# EAGLE board Buffered Mult PANEL (EAGLE 7.7.0)
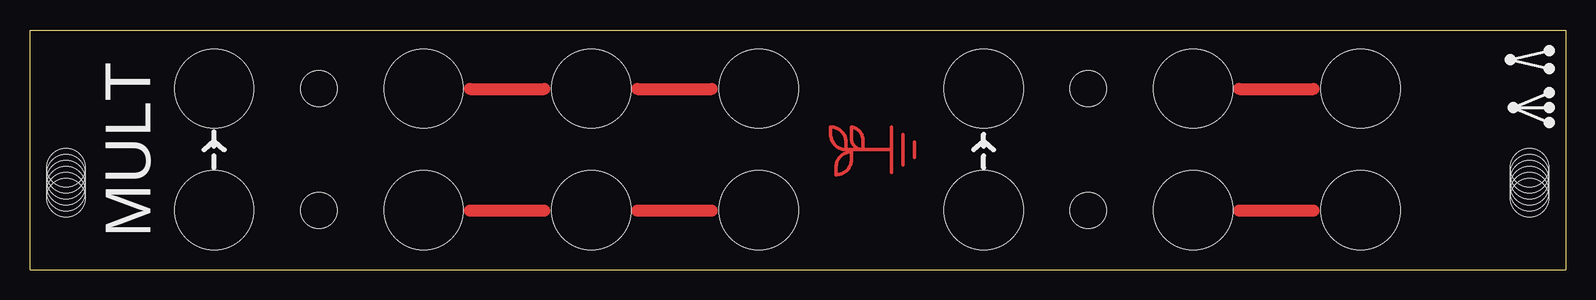
[diagram p0: board, top side]
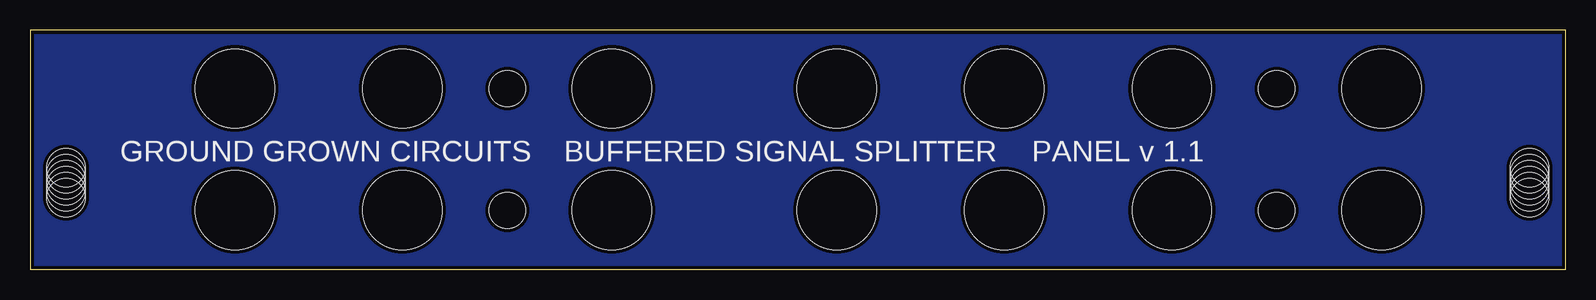
[diagram p1: board, bottom side, seen from below]

Size 128 x 20 mm. Coordinates in mm from the lower left corner, seen from the top.
Outline: 0,0 0,20 128,20 128,0 0,0
Copper layers (1*16): Top 0.035mm / dielectric 1.5mm / Bottom 0.035mm
Design rules "SparkFun": minimum track width 8mil, minimum drill 20mil, track to track 8mil, track to pad 8mil, pad to pad 8mil, via to via 8mil, smd to smd 8mil, copper to edge 8mil, drill to drill 8mil, minimum pad ring 12mil, minimum via ring 10mil, stop-mask expansion 4mil, vias tented up to drill 20mil, thermal gap 10mil
Holes 6.6 mm at 15.35,15.11 15.35,4.95 32.81,15.11 32.81,4.95 46.78,4.95 46.78,15.11 60.75,4.95 60.75,15.11 79.48,15.11 79.48,4.95 96.95,15.11 96.95,4.95 110.92,15.11 110.92,4.95
Holes 3 mm at 24.08,4.95 24.08,15.11 88.22,4.95 88.22,15.11
Holes 3.2 mm at 3,7.5 3,8 3,8.5 3,7 3,6.5 3,6 125,7.5 125,8 125,8.5 125,7 125,6.5 125,6

## Placement (x,y rotation side)
E$1  [LOGO_SMALL_COPPER]  71.75,10 90 top

## Library data of the parts
E$1 = GroundGrownCircuits

## Tracks (layer width: path | path; a pad name or v marks a point on that pad's centre or on a via)
S$1
  pour Bottom (isolate 0.305): 0,0 0,20 128,20 128,0
S$2
  Top 1.016: 100.81,15.08 107,15.08
S$3
  Top 1.016: 50.64,15.08 56.83,15.08
S$4
  Top 1.016: 36.67,15.08 42.86,15.08
S$5
  Top 1.016: 36.67,4.92 42.86,4.92
S$6
  Top 1.016: 50.64,4.92 56.83,4.92
S$7
  Top 1.016: 100.81,4.92 107,4.92

## Text on the board
tPlace: MULT
bPlace: PANEL v 1.1 | BUFFERED SIGNAL SPLITTER | GROUND GROWN CIRCUITS